# Altium PCB stm8core.PcbDoc
Units mil, origin at the board's own origin, x right, y up, seen from the top; angles counter-clockwise.
Board outline 3937.01 x 3937.01 mil, 2 copper layers (Component Side, Solder Side); 46 components, 88 nets, 299 pads, 55 vias.
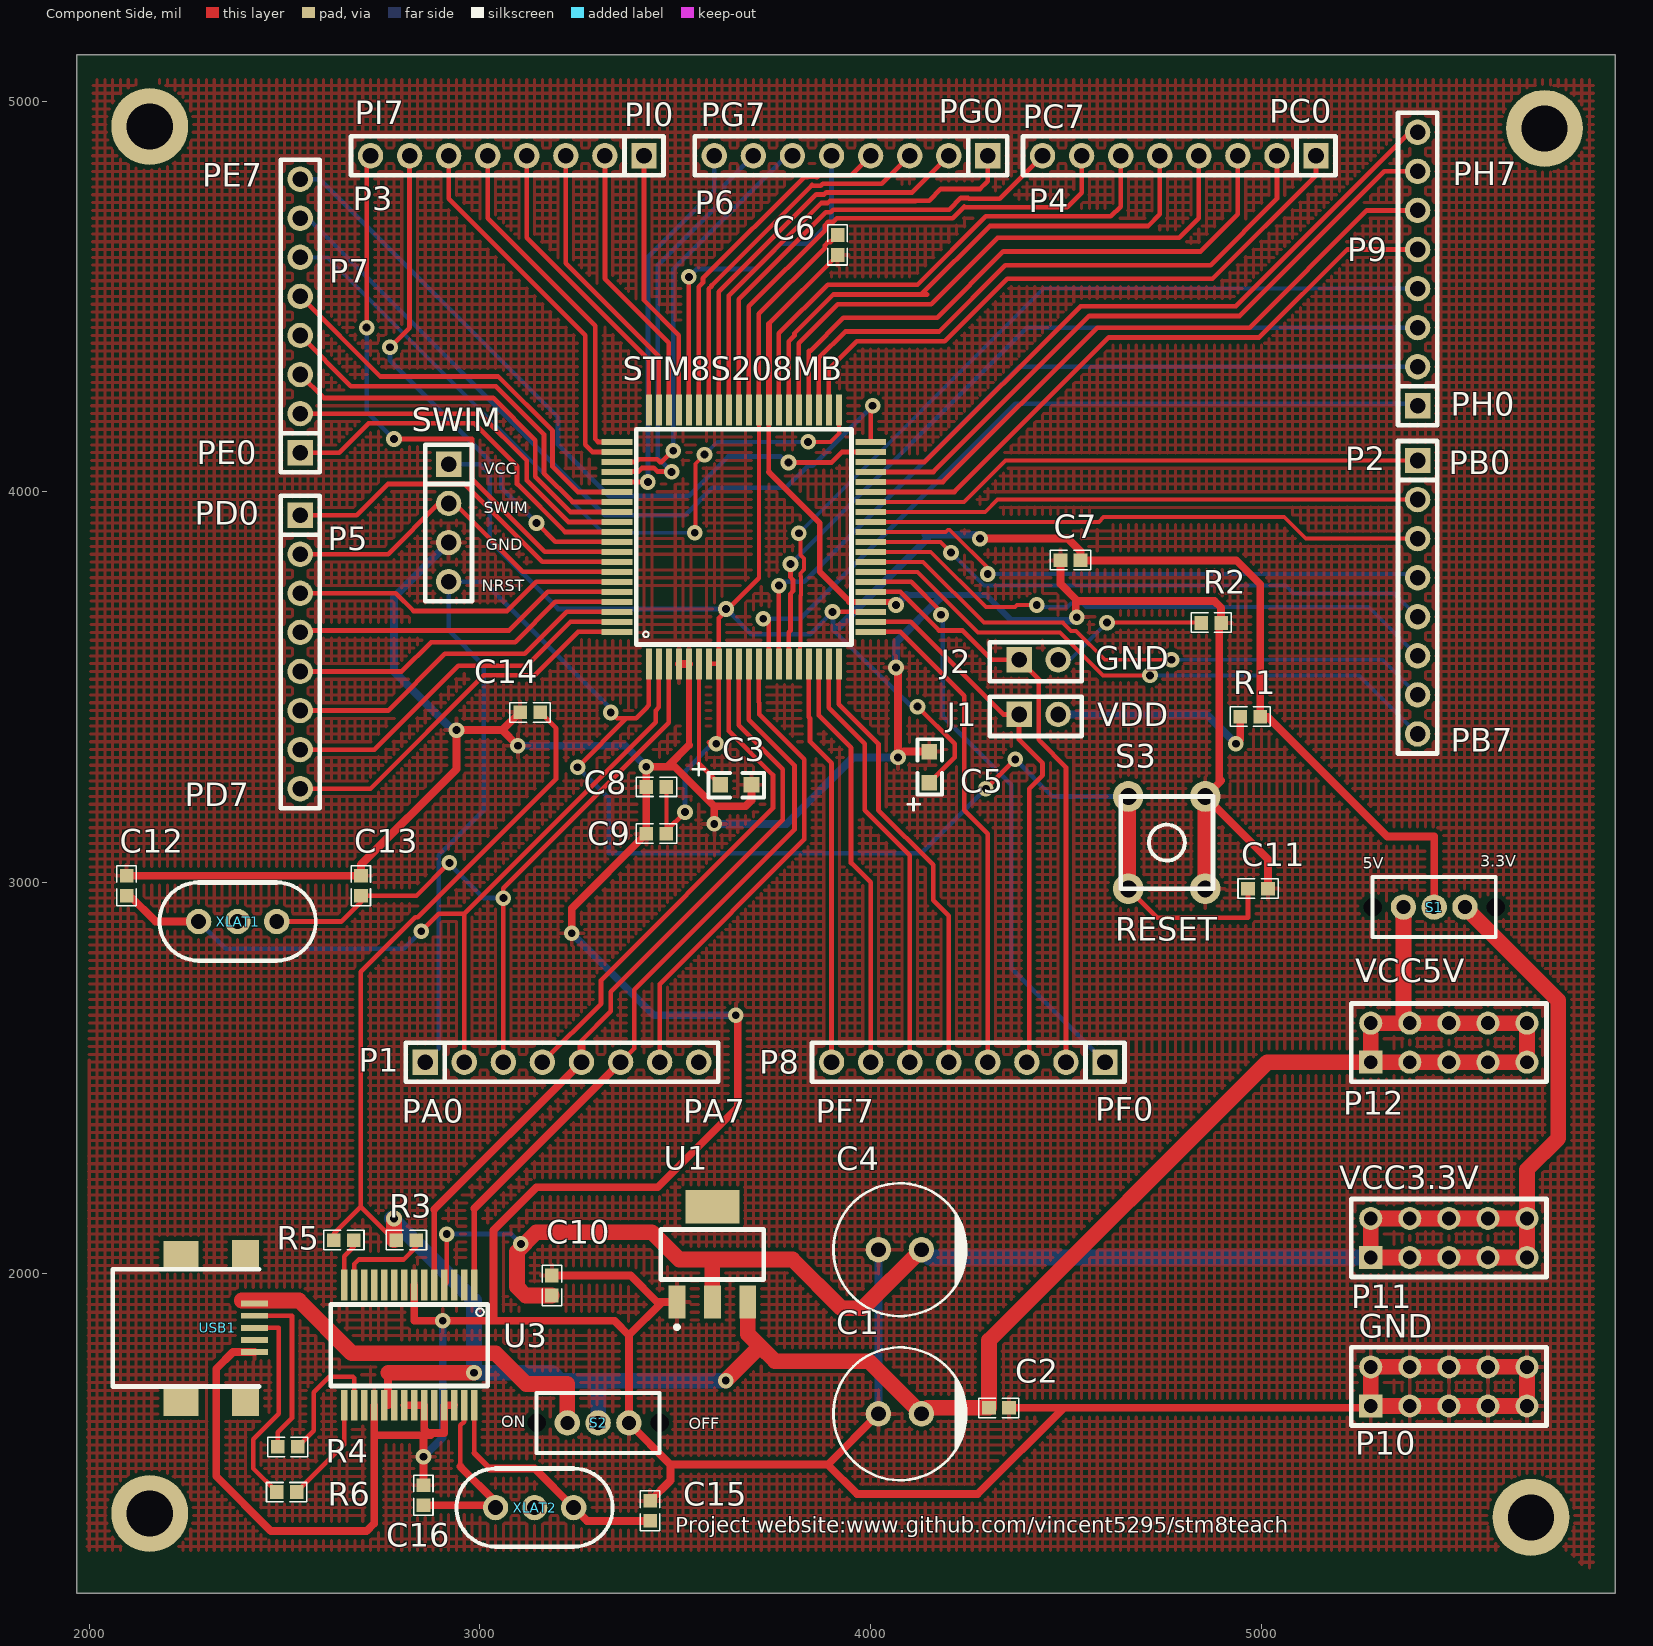
[diagram p0: Component Side view]
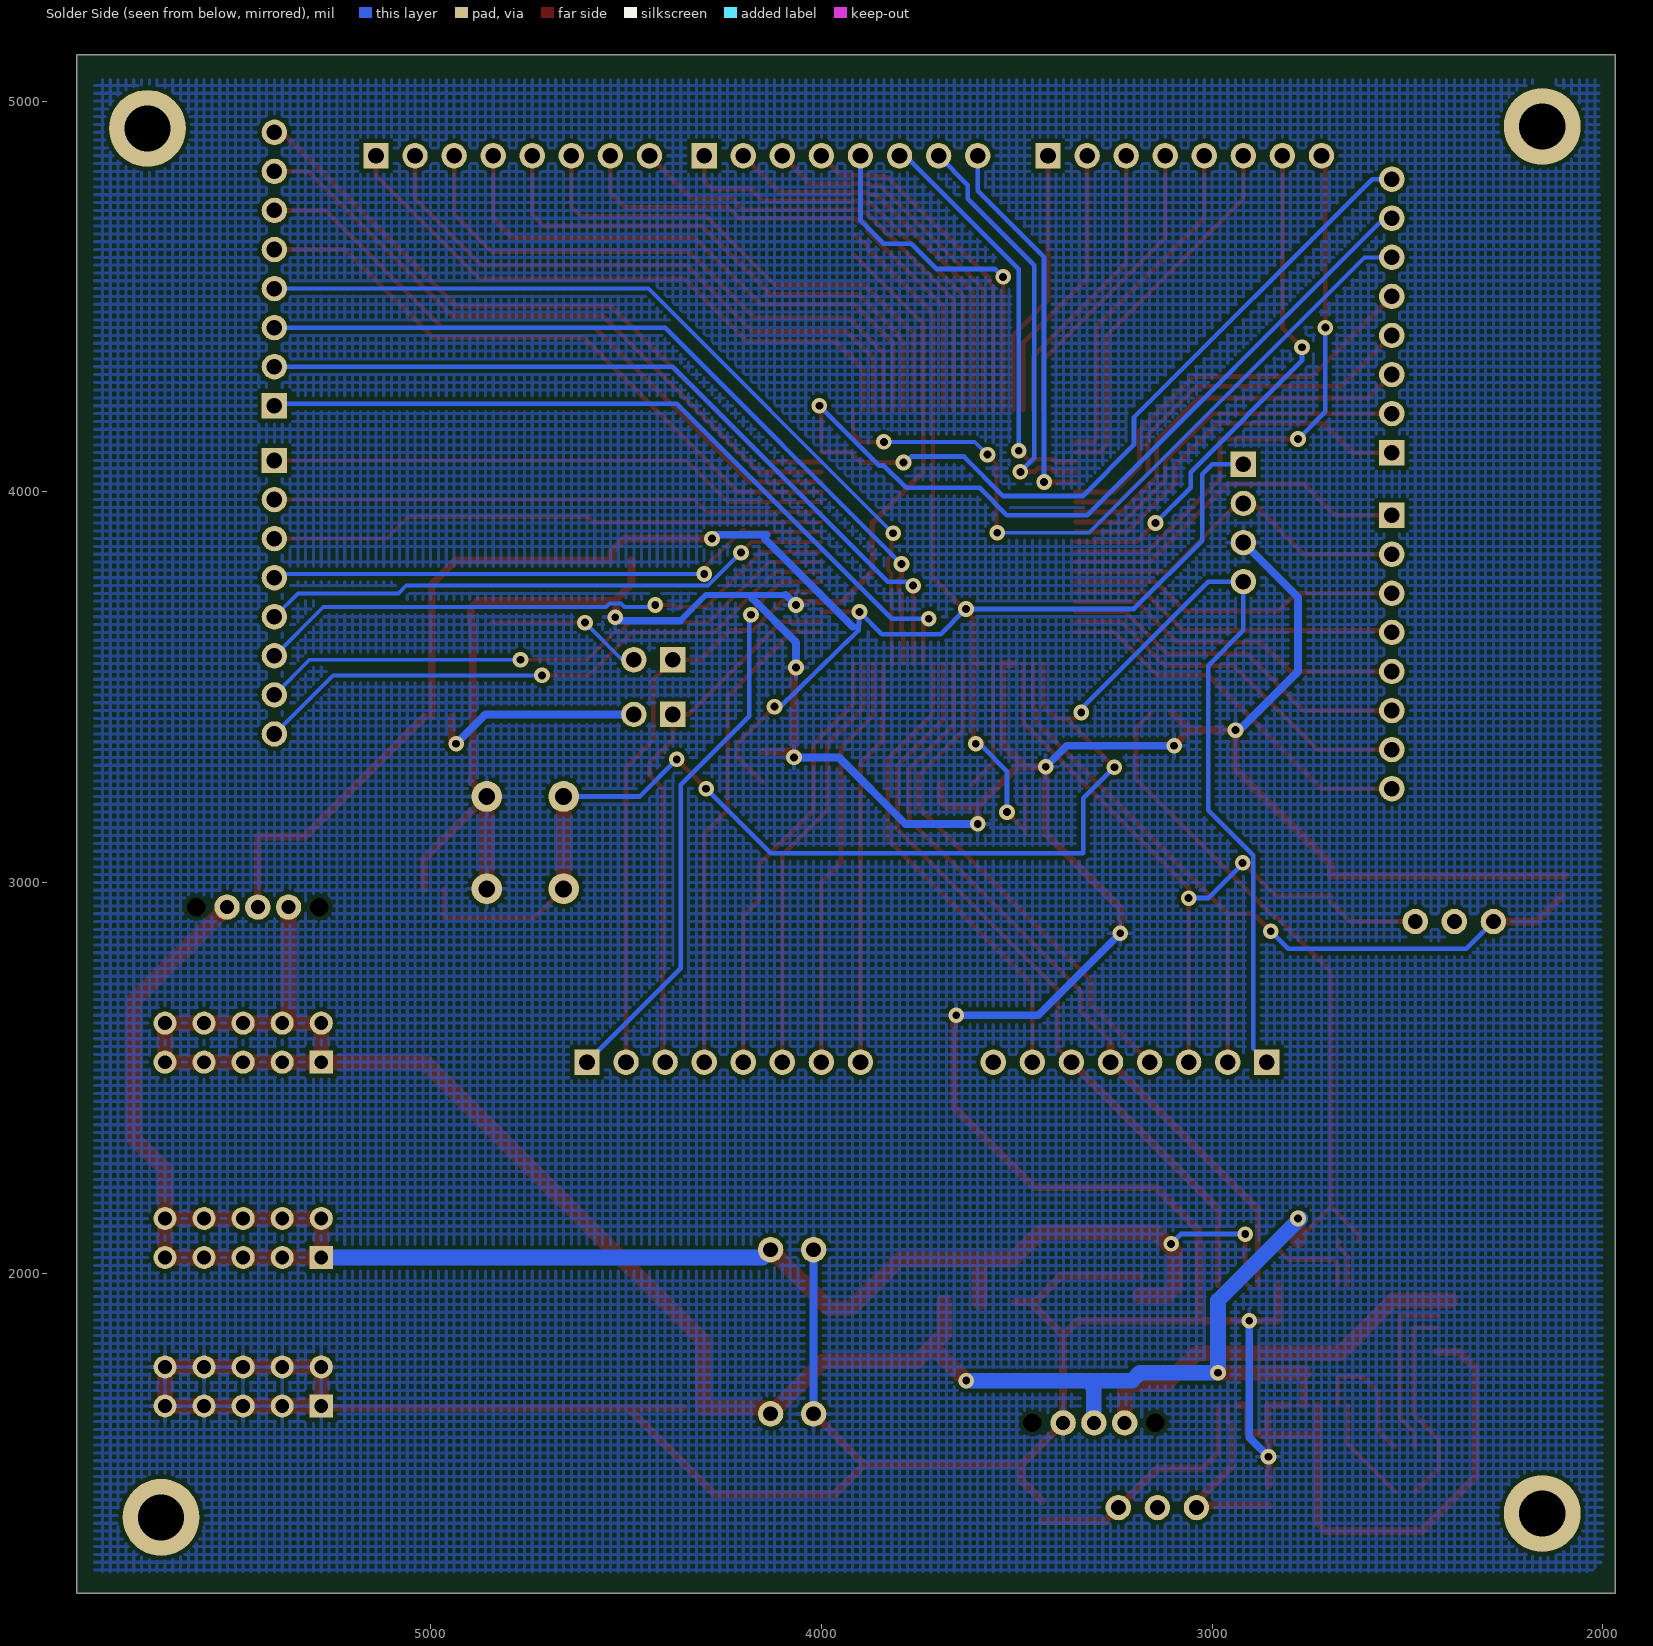
[diagram p1: Solder Side view, seen from below]

## Layer stack, top to bottom
Component Side: signal copper 1.4
Dielectric: core 12.6, FR-4, Dk 4.8
Solder Side: signal copper 1.4

## Board outline
1968.5,1181.1 5905.51,1181.1 5905.51,5118.11 1968.5,5118.11

## Design rules (kind name [scope] priority, off if disabled: settings)
Clearance [All] p1: gap=10
DiffPairsRouting [All] p1: maxlimit=10 minlimit=1 mostfreqgap=10 maxuncoupledlength=500
PolygonConnect [All] p1: connectstyle=Relief reliefconductorwidth=10 reliefentries=4 polygonreliefangle="90 Angle"
RoutingVias [All] p1: holewidth=20 width=40 viastyle="Through Hole" minholewidth=20 minwidth=40 maxholewidth=20 maxwidth=40
SilkscreenOverComponentPads [All] p1: minsilkscreentomaskgap=10
SolderMaskExpansion [All] p1: expansion=4
Width [All] p1: maxlimit=60 minlimit=10 preferedwidth=45
26 further rules are at their usual default settings.

## Components (designator, comment, footprint, x,y, rotation, side; value= is the part's Value field where it differs from the comment)
C1 "Cap2" RB-.1/.3 4020,1640 r0 top
C2 "Cap" 0603 4360,1640 r180 top
C3 "Cap Pol2" 3216 3640,3280 r0 top
C4 "Cap2" RB-.1/.3 4020,2060 r0 top
C5 "Cap Pol2" 3216 4120,3280 r90 top
C6 "Cap" 0603 3900,4600 r90 top
C7 "Cap" 0603 4480,3840 r0 top
C8 "Cap" 0603 3420,3260 r0 top
C9 "Cap" 0603 3420,3140 r0 top
C10 "Cap" 0603 3200,2000 r270 top
C11 "Cap" 0603 4960,3000 r0 top
C12 "Cap" 0603 2080,2960 r90 top
C13 "Cap" 0603 2680,2960 r90 top
C14 "Cap" 0603 3160,3420 r180 top
C15 "Cap" 0603 3420,1360 r90 top
C16 "Cap" 0603 2840,1400 r90 top
J1 "VDD" JUMPER 4300,3480 r0 top (schematic designator JUMPER1)
J2 "GND" JUMPER 4300,3620 r0 top
P1 "Header 8" SIP8 2860,2540 r0 top
P2 "Header 8" SIP8 5400,4080 r270 top
P3 "Header 8" SIP8 3420,4860 r180 top
P4 "Header 8" SIP8 5140,4860 r180 top
P5 "Header 8" SIP8 2540,3940 r270 top
P6 "Header 8" SIP8 4300,4860 r180 top
P7 "Header 8" SIP8 2540,4100 r90 top
P8 "Header 8" SIP8 4600,2540 r180 top
P9 "Header 8" SIP8 5400,4220 r90 top
P10 "GND" HDR2X5 5280,1660 r0 top
P11 "VCC3.3V" HDR2X5 5280,2040 r0 top
P12 "VCC5V" HDR2X5 5280,2540 r0 top
R1 "Res2" 0603 4940,3440 r0 top
R2 "Res2" 0603 4840,3680 r0 top
R3 "Res2" 0603 2780,2100 r0 top
R4 "Res2" 0603 2540,1540 r180 top
R5 "Res2" 0603 2620,2100 r0 top
R6 "Res2" 0603 2537.09,1424.25 r180 top
S1 "SW-SPDT" SW3 5600,2860 r180 top
S2 "SW-SPDT" SW3 3460,1540 r180 top
S3 "RESET" SW-PB 4640,3220 r0 top
STM8S208MB "STM8S208MB" LQFP80 3400,4160 r0 top (schematic designator U2)
SWIM "SWIM" SIP4 2860,4120 r0 top (schematic designator SWIM1)
U1 "AMS1117-3.3" SOT-223 3520,2220 r0 top
U3 "PL2303" SSOP28 3020,1920 r270 top
USB1 "USB" MINI_USB 2300,1860 r90 top
XLAT1 "XLAT" XTAL 2380,2900 r0 top
XLAT2 "XLAT" XTAL 3140,1400 r180 top

## Footprints (in the part's own frame and the unit in brackets; to place one, negate y for a bottom-side part, rotate by r counter-clockwise, add the part's x,y. Pads: shape width x height; smd on the part's side, far side on the other; paste and mask are expansions set on the pad)
0603 [mil]
  rect 35x35 smd: 1(5.91,-15.75) 2(57.09,-15.75)
  silkscreen extent -20,-40 83,10
3216 [mil]
  rect 40x40 smd: 1(-25,-30) 2(55,-30)
  silkscreen extent -95,-63 87,25
HDR2X5 [mm] "Connector; Header; 5x2 Position"
  rect 1.5x1.5 hole 0.9: 1(0,0)
  round 1.5 hole 0.9: 2(0,2.54) 3(2.54,0) 4(2.54,2.54) 5(5.08,0) 6(5.08,2.54) 7(7.62,0) 8(7.62,2.54) 9(10.16,0) 10(10.16,2.54)
  silkscreen extent -1.27,-1.27 11.43,3.81
JUMPER [mil]
  rect 65x65 hole 40: 1(80,-50)
  round 65 hole 40: 2(180,-50)
  silkscreen extent 5,-105 240,-5
LQFP80 [mm]
  rect 0.4x2 smd: 1(0.825,-15.254) 2(1.475,-15.254) 3(2.125,-15.254) 4(2.775,-15.254) 5(3.425,-15.254) 6(4.075,-15.254) 7(4.725,-15.254) 8(5.375,-15.254) 9(6.025,-15.254) 10(6.675,-15.254) 11(7.325,-15.254) 12(7.975,-15.254) 13(8.625,-15.254) 14(9.275,-15.254) 15(9.925,-15.254) 16(10.575,-15.254) 17(11.225,-15.254) 18(11.875,-15.254) 19(12.525,-15.254) 20(13.175,-15.254) 41(13.175,1.254) 42(12.525,1.254) 43(11.875,1.254) 44(11.225,1.254) 45(10.575,1.254) 46(9.925,1.254) 47(9.275,1.254) 48(8.625,1.254) 49(7.975,1.254) 50(7.325,1.254) 51(6.675,1.254) 52(6.025,1.254) 53(5.375,1.254) 54(4.725,1.254) 55(4.075,1.254) 56(3.425,1.254) 57(2.775,1.254) 58(2.125,1.254) 59(1.475,1.254) 60(0.825,1.254)
  rect 2x0.4 smd: 21(15.254,-13.175) 22(15.254,-12.525) 23(15.254,-11.875) 24(15.254,-11.225) 25(15.254,-10.575) 26(15.254,-9.925) 27(15.254,-9.275) 28(15.254,-8.625) 29(15.254,-7.975) 30(15.254,-7.325) 31(15.254,-6.675) 32(15.254,-6.025) 33(15.254,-5.375) 34(15.254,-4.725) 35(15.254,-4.075) 36(15.254,-3.425) 37(15.254,-2.775) 38(15.254,-2.125) 39(15.254,-1.475) 40(15.254,-0.825) 61(-1.254,-0.825) 62(-1.254,-1.475) 63(-1.254,-2.125) 64(-1.254,-2.775) 65(-1.254,-3.425) 66(-1.254,-4.075) 67(-1.254,-4.725) 68(-1.254,-5.375) 69(-1.254,-6.025) 70(-1.254,-6.675) 71(-1.254,-7.325) 72(-1.254,-7.975) 73(-1.254,-8.625) 74(-1.254,-9.275) 75(-1.254,-9.925) 76(-1.254,-10.575) 77(-1.254,-11.225) 78(-1.254,-11.875) 79(-1.254,-12.525) 80(-1.254,-13.175)
  silkscreen extent 0,-14 14,0
MINI_USB [mil]
  rect 15x70 smd: 1(62,-123) 2(31,-123) 3(0,-123) 4(-62,-123) NC(-31,-123)
  rect 70x70 smd: ""(-190,-100) ""(190,-100)
  rect 70x90 smd: ""(-190,65) ""(187,65)
  silkscreen extent -150,-135 150,240
RB-.1/.3 [mil] "47uF 100uF 220uF 470uF"
  round 65 hole 38: 1(0,0) 2(110,0)
  silkscreen extent -115,-170 226,170
SIP4 [mil]
  rect 65x65 hole 40: 1(60,-50)
  round 65 hole 40: 2(60,-150) 3(60,-250) 4(60,-350)
  silkscreen extent 0,-400 120,0
SIP8 [mil]
  rect 65x65 hole 40: 1(0,0)
  round 65 hole 40: 2(100,0) 3(200,0) 4(300,0) 5(400,0) 6(500,0) 7(600,0) 8(700,0)
  silkscreen extent -50,-50 750,50
SOT-223 [mm]
  rect 1.1x2.15 smd: 1(-0.395,-7.47) 2(1.905,-7.47) 3(4.205,-7.47)
  rect 3.5x2.15 smd: 4(1.905,-1.27)
  silkscreen extent -1.45,-9.22 5.26,-2.74
SSOP28 [mm] "SSOP28forPL2303"
  rect 2x0.42 smd: 1(-1.254,-0.875) 2(-1.254,-1.525) 3(-1.254,-2.175) 4(-1.254,-2.825) 5(-1.254,-3.475) 6(-1.254,-4.125) 7(-1.254,-4.775) 8(-1.254,-5.425) 9(-1.254,-6.075) 10(-1.254,-6.725) 11(-1.254,-7.375) 12(-1.254,-8.025) 13(-1.254,-8.675) 14(-1.254,-9.325) 15(6.554,-9.325) 16(6.554,-8.675) 17(6.554,-8.025) 18(6.554,-7.375) 19(6.554,-6.725) 20(6.554,-6.075) 21(6.554,-5.425) 22(6.554,-4.775) 23(6.554,-4.125) 24(6.554,-3.475) 25(6.554,-2.825) 26(6.554,-2.175) 27(6.554,-1.525) 28(6.554,-0.875)
  silkscreen extent 0,-10.2 5.3,0
SW3 [mm]
  round 1.651 hole 0.914: 1(2,-1.95) 2(4,-1.95) 3(6,-1.95)
  round 0 hole 1.2: ""(0,-1.95) ""(8,-1.95)
  silkscreen extent 0,-3.9 8,0
SW-PB [mm]
  round 2 hole 1.1: 1(0.5,-6) 1(0.5,0) 2(5.5,-6) 2(5.5,0)
  silkscreen extent 0,-6 6,0
XTAL [mil]
  round 65 hole 38: 1(-100,0) 2(100,0) ""(0,0)
  silkscreen extent -200,-100 200,100

## Part data
C1 C2 C4 C6 C7 C8 C9 C10 C11 C12 C13 C14 C15 C16: "Capacitor"
C3 C5: "Polarized Capacitor (Axial)"
J1 J2: library part JNMPER
P1 P2 P3 P4 P5 P6 P7 P8 P9: "Header, 8-Pin"
P10 P11 P12: library part "Header 5X2", "Header, 5-Pin, Dual row"
R1 R2 R3 R4 R5 R6: "Resistor"
S1 S2: "SPDT Subminiature Toggle Switch, Right Angle Mounting, Vertical Actuation"
S3: library part SW-PB, "Switch"
STM8S208MB: library part STM8
XLAT1 XLAT2: library part MYXLAT

## Free pads (board coordinates)
  round 196.85 hole 118.11: ""(2155,1385) ""(2155,4935) ""(5690,1375) ""(5725,4930)

## Via types
v1: diameter 40, hole 20, Component Side to Solder Side, 55 vias

## Nets (pads, with @x,y where several pads share a name; then routed paths per layer and width w, separated by ;. In a path a pad name is that pad's centre, name@x,y a point inside that pad or via, vN(x,y) a via of type N, cw(c..) or ccw(c..) an arc to the next point about the centre after c; other vN are vias at no path point)
GND: C1.1 C2.1 C3.2 C4.1 C5.2 C6.1 C7.1 C8.1 C9.1 C10.1 C11.2 C12.2 C13.2 C14.2 C15.2 C16.2 P10.1 P10.2 P10.3 P10.4 P10.5 P10.6 P10.7 P10.8 P10.9 P10.10 R2.2 S2.1 S3.2 STM8S208MB.4 STM8S208MB.5 STM8S208MB.24 STM8S208MB.48 SWIM.3 U1.1 U3.7 U3.18 U3.21 U3.22 U3.23 U3.25 U3.26 USB1.4 | length 16880.9
  Component Side w12: 3739.57,4050.43 STM8S208MB.48 ; 3739.57,4429.72 C6.1
  Component Side w15: 3534.84,3351.06 STM8S208MB.5 ; 3739.57,4050.43 3870,3920 3870,3795 3940,3725 ; STM8S208MB.48 3739.57,4429.72 ; 3945,3718.07 STM8S208MB.24 v1@4056.93,3718.07
  Component Side w20: C12.2 C13.2 2695.75,3045.75 2940,3290 v1(2940,3390) 3057.17,3390 ; USB1.4 2368,1798 2325,1755 2325,1480 2465,1340 2710,1340 2729.65,1359.65 2729.65,1585 ; U3.18 2729.65,1585 ; U3.21 U3.22 U3.23 2857.6,1599.84 2866.22,1591.22 2908.78,1591.22 U3.25 U3.26 ; U3.7 2832.01,1877.99 v1(2905,1877.99) 3035,1877.99 ; C16.2 v1(2855.75,1530) 2855.75,1584.25 ; 2873.78,1585 2729.65,1585 ; v1(3097.17,3350) 3057.17,3390 ; C14.2 3057.17,3390 ; C10.1 3385.91,1994.09 3454.09,1925.91 3465.91,1925.91 ; v1(3235,2870) 3235,2933.35 C9.1 C8.1 v1(3425.91,3296.22) 3480,3296.22 ; C15.2 3488.03,1469.37 3488.03,1510 ; U1.1 3465.91,1925.91 ; STM8S208MB.4 STM8S208MB.5 ; 3534.84,3351.06 3480,3296.22 ; v1(3600,3150) 3600,3195 ; v1(3655,2660) 3660,2660 3660,2425 3455,2220 3145,2220 3035,2110 3035,1877.99 ; C3.2 3695,3210 3680,3195 3600,3195 ; C1.1 3890,1510 ; v1@4056.93,3718.07 v1(4065,3710) ; v1(4065,3550) 4070,3545 v1(4070,3320) 4085,3335 C5.2 ; C2.1 4495,1655.75 ; C7.1 4485.91,3764.09 4525,3725 ; v1(4527.77,3679) 4525,3681.77 4525,3725 ; 4892.09,3255.55 R2.2@4892.09,3659.25 ; 4897.09,3260.55 4856.54,3220 5017.09,3059.45 C11.2 ; R2.2 4897.09,3702.91 4880,3720 4530,3720 4525,3725 ; P10.1@5275.75,1655.75 4495,1655.75 ; 3035,1877.99 3344.53,1877.99 3381.26,1841.26 ; 3381.26,1841.26 S2.1 3488.03,1510 ; 3381.26,1841.26 3465.91,1925.91 ; 3480,3296.22 3498.78,3296.22 3600,3195 ; 3488.03,1510 3890,1510 ; 3890,1510 3965,1435 4274.25,1435 4495,1655.75
  Component Side w40: S3.2@4856.54,2983.78 S3.2@4856.54,3220 ; P10.2@5280,1745 P10.1 P10.3 P10.5 P10.7 P10.9 P10.10 P10.8 P10.6 P10.4 P10.2
  Solder Side w15: 4091,3736 4295.16,3736 4361.16,3670
  Solder Side w20: v1(2855.75,1530) 2905,1579.25 v1(2905,1877.99) ; SWIM.3 2780,3730 2780,3540 2935,3385 v1(2940,3390) ; v1(3097.17,3350) 3372.13,3350 v1(3425.91,3296.22) ; v1(3235,2870) 3445,2660 v1(3655,2660) ; v1(3600,3150) 3785,3150 3955,3320 v1(4070,3320) ; C1.1 C4.1 ; v1(4065,3550) 4065,3615 4176,3726 ; v1(4065,3710) 4091,3736 ; 4361.16,3670 4518.77,3670 v1(4527.77,3679)
NetJ1_2: J1.2 R1.1 | length 559.8
  Component Side w20: v1(4935,3355) 4945.91,3365.91 R1.1
  Solder Side w20: J1.2 4860,3430 v1(4935,3355)
NetJ2_2: J2.2 R2.1 | length 404.5
  Component Side w10: v1(4605,3665) R2.1@4845.16,3665
  Solder Side w10: J2.2 4510,3570 v1(4605,3665)
NetR3_2: R3.2 U3.13 | length 248
  Component Side w12: U3.13 2678.46,2023.46 2690,2035 2805,2035 2837.09,2067.09 R3.2
NetR4_1: R4.1 U3.16 | length 347.2
  Component Side w12: R4.1 2575,1596.65 2575,1695 2615,1735 2675,1735 2678.46,1731.54 U3.16
NetR5_2: R5.2 U3.14 | length 124.9
  Component Side w12: U3.14 2652.87,2042.87 2677.09,2067.09 R5.2
NetR6_1: R6.1 U3.15 | length 272.4
  Component Side w12: R6.1 2652.87,1561.69 U3.15
NRST: C11.1 P1.1 S3.1 STM8S208MB.1 SWIM.4 | length 4583
  Component Side w12: v1(3250,3295) 3375,3420 ; 3350,3420 3375,3420 ; STM8S208MB.1 3432.48,3453.59 3428,3449.11 3428,3448.04 3399.96,3420 3375,3420 ; v1(4295,3240) v1(4370,3315) ; S3.1@4659.69,2983.78 4733.47,2910 4960.91,2910 ; 4965.91,2910 C11.1
  Component Side w40: S3.1@4659.69,2983.78 S3.1@4659.69,3220
  Solder Side w12: 2895,2575 2895,3070 3010,3185 3010,3555 2920,3645 SWIM.4 3010,3770 3335,3445 v1(3335,3435) ; v1(3250,3295) 3330,3215 3330,3075 4130,3075 v1(4295,3240) ; v1(4370,3315) 4465,3220 S3.1@4659.69,3220
OSCIN: C12.1 P1.2 STM8S208MB.2 XLAT1.1 | length 2175.2
  Component Side w12: v1(2850,2875) 2895,2920 2960,2920 ; P1.2 2960,2920 ; STM8S208MB.2 3458.07,3448.07 3450,3440 3450,3410 2960,2920
  Component Side w20: C12.1@2104.09,2965.91 2170,2900 XLAT1.1
  Solder Side w12: XLAT1.1 2350,2830 2805,2830 v1(2850,2875)
OSCOUT: C13.1 P1.3 STM8S208MB.3 XLAT1.2 | length 1869.5
  Component Side w12: XLAT1.2 2645,2900 C13.1@2695.75,2950.75 ; C13.1 2837.72,2965.91 v1(2922,3050.18) ; P1.3 v1(3060,2960) 3060,2985 3483.66,3408.66 STM8S208MB.3
  Solder Side w12: v1(2922,3050.18) 2922,3048 3010,2960 v1(3060,2960)
PA3: P1.4 STM8S208MB.9 | length 1310.6
  Component Side w12: P1.4 3310,2690 3310,2750 3750,3190 3750,3275 3637.2,3387.8 STM8S208MB.9
PA4: P1.5 STM8S208MB.10 U3.5 | length 1996
  Component Side w12: 3260,2595 3335,2670 3335,2720 3775,3160 3775,3290 3662.8,3402.2 STM8S208MB.10
  Component Side w15: U3.5 2883.19,2163.19
  Component Side w20: 2883.19,2163.19 P1.5 3260,2585
PA5: P1.6 STM8S208MB.11 U3.1 | length 1977.8
  Component Side w12: P1.6 3395,2575 3395,2725 3805,3135 3805,3300 3688.39,3416.61 STM8S208MB.11
  Component Side w15: U3.1 2985.55,2165.55
  Component Side w20: 2985.55,2165.55 P1.6
PA6: P1.7 STM8S208MB.12 | length 1220.8
  Component Side w12: P1.7 3460,2740 3830,3110 3830,3315 3715,3430 3715,3460 3713.98,3461.02 STM8S208MB.12
PA7: P1.8
PB0: P2.1 STM8S208MB.34 | length 1443.4
  Component Side w10: STM8S208MB.34 4238.98,3973.98 4345,4080 P2.1
PB1: P2.2 STM8S208MB.33 | length 1412.5
  Component Side w10: STM8S208MB.33 4293.39,3948.39 4325,3980 P2.2
PB2: P2.3 STM8S208MB.32 | length 1427.3
  Component Side w10: STM8S208MB.32 4584.05,3922.8 4596.25,3935 5058.75,3935 5113.75,3880 P2.3
PB3: P2.4 STM8S208MB.31 | length 1439.5
  Component Side w10: STM8S208MB.31 4192.2,3897.2 4197.8,3902.8 ; 4202.2,3902.8 v1@4307.8,3797.2
  Solder Side w10: v1(4300,3789.41) P2.4@5390.59,3789.41
PB4: P2.5 STM8S208MB.30 | length 1478.8
  Component Side w10: STM8S208MB.30 4178.39,3871.61 v1(4205.69,3844.31)
  Solder Side w10: v1(4205.69,3844.31) 4290,3760 5062.5,3760 5082.5,3740 5340,3740 P2.5
PB5: P2.6 STM8S208MB.29 | length 1514.2
  Component Side w10: STM8S208MB.29 4153.98,3846.02 4295,3705 4370,3705 4375,3710 v1(4425,3710)
  Solder Side w10: v1@4430,3705 4504.27,3705 4513.27,3714 4542.27,3714 4551.27,3705 5275,3705 P2.6
PB6: P2.7 STM8S208MB.28 | length 1540.8
  Component Side w10: STM8S208MB.28 4134.57,3820.43 4290,3665 4492.77,3665 4492.77,3664.5 4513.27,3644 4526,3644 4600,3570 v1(4770,3570)
  Solder Side w10: v1(4770,3570) 5310,3570 P2.7
PB7: P2.8 STM8S208MB.27 | length 1571.3
  Component Side w10: STM8S208MB.27 4120.16,3794.84 4275,3640 4485,3640 4595,3530 v1(4715,3530)
  Solder Side w10: v1(4715,3530) 5250,3530 P2.8
PC0: P4.1 STM8S208MB.42 | length 1606.4
  Component Side w12: STM8S208MB.42 3893.11,4313.11 3965,4385 4190,4385 4350,4545 4875,4545 5140,4810 P4.1
PC1: P4.2 STM8S208MB.43 | length 1584.4
  Component Side w12: STM8S208MB.43 3867.52,4342.52 3935,4410 4175,4410 4345,4580 4870,4580 5040,4750 P4.2
PC2: P4.3 STM8S208MB.44 | length 1543.7
  Component Side w12: STM8S208MB.44 3841.93,4360 3845,4360 3930,4445 4170,4445 4340,4615 4845,4615 4940,4710 P4.3
PC3: P4.4 STM8S208MB.45 | length 1486.8
  Component Side w12: STM8S208MB.45 3816.34,4380 3916.34,4480 4155,4480 4325,4650 4790,4650 4840,4700 P4.4
PC4: P4.5 STM8S208MB.46 | length 1422
  Component Side w12: STM8S208MB.46 3790.75,4385 ; 3794.34,4388.59 3794.34,4389.11 3805,4399.77 3805,4405 3905,4505 4130,4505 ; 4144.25,4505 4130,4505 ; P4.5 4740,4710 4710,4680 4305,4680 4130,4505
PC5: P4.6 STM8S208MB.47 | length 1335.2
  Component Side w12: STM8S208MB.47 3765.16,4405.16 3890,4530 4120,4530 4295,4705 4615,4705 4640,4730 P4.6
PC6: P4.7 STM8S208MB.50 | length 1341.3
  Component Side w12: STM8S208MB.50 3688.39,4474.62 3882.25,4668.49 3882.25,4681.21 3891.62,4690.59 3904.35,4690.59 3913.76,4700 4210,4700 4240,4730 4242,4728 4503,4728 4540,4765 P4.7
PC7: P4.8 STM8S208MB.51 | length 1214.4
  Component Side w12: STM8S208MB.51 3662.8,4492.87 3884.92,4715 3897.65,4715 3904.65,4722 4200.89,4722 4230.89,4752 4249.11,4752 4251.11,4750 4330,4750 P4.8
PD0: P5.1 STM8S208MB.73 | length 926.4
  Component Side w12: P5.1 2685,3940 2765,4020 2960,4020 3159.57,3820.43 STM8S208MB.73
PD1: P5.2 STM8S208MB.74 SWIM.2 | length 937
  Component Side w12: P5.2 2765,3840 2895,3970 SWIM.2 2935,3970 3110.16,3794.84 STM8S208MB.74
PD2: P5.3 STM8S208MB.75 | length 860
  Component Side w12: P5.3 2785,3740 2830,3695 3070,3695 3144.25,3769.25 STM8S208MB.75
PD3: P5.4 STM8S208MB.76 | length 846.5
  Component Side w12: P5.4@2545,3645 3075,3645 3173.66,3743.66 STM8S208MB.76
PD4: P5.5 STM8S208MB.77 | length 884.4
  Component Side w12: P5.5 2800,3540 2875,3615 3090,3615 3193.07,3718.07 STM8S208MB.77
PD5: P5.6 STM8S208MB.78 | length 915.2
  Component Side w12: P5.6 2765,3440 2910,3585 3115,3585 3222.48,3692.48 STM8S208MB.78
PD6: P5.7 STM8S208MB.79 | length 946
  Component Side w12: P5.7 2730,3340 2945,3555 3120,3555 3231.89,3666.89 STM8S208MB.79
PD7: P5.8 STM8S208MB.80 | length 976.9
  Component Side w12: P5.8 2720,3240 3010,3530 3140,3530 3251.3,3641.3 STM8S208MB.80
PE0: P7.1 STM8S208MB.70 | length 983.1
  Component Side w12: P7.1 2640,4100 2715,4175 2985,4175 3095,4065 3095,4020 3217.8,3897.2 STM8S208MB.70
PE1: P7.2 STM8S208MB.69 | length 955.4
  Component Side w12: P7.2 3000,4200 3120,4080 3120,4028.89 3226.09,3922.8 STM8S208MB.69
PE2: P7.3 STM8S208MB.68 | length 1011.3
  Component Side w12: P7.3 2600,4240 3033.89,4240 3142,4131.89 3142,4038 3231.61,3948.39 STM8S208MB.68
PE3: P7.4 STM8S208MB.67 | length 1045.7
  Component Side w12: P7.4 2670,4270 3041.11,4270 3164,4147.11 3164,4047.11 3237.14,3973.98 STM8S208MB.67
PE4: P7.5 STM8S208MB.66 | length 1071.9
  Component Side w12: P7.5 2745,4295 3047.23,4295 3186,4156.23 3186,4064 3250.43,3999.57 STM8S208MB.66
PE5: P7.6 STM8S208MB.41 | length 1938.5
  Component Side w10: v1@3551.64,3896.64 3551.64,4071.64 v1(3575,4095) ; v1(3840,4127.5) 3897.5,4127.5 3918.7,4148.7 ; STM8S208MB.41 3918.7,4148.7 ; 3920,4150 3918.7,4148.7
  Solder Side w10: P7.6 2610,4600 3315,3895 v1(3550,3895) ; v1(3575,4095) 3607.5,4127.5 v1(3840,4127.5)
PE6: P7.7 STM8S208MB.40 | length 1970.1
  Component Side w12: STM8S208MB.40 4000.55,4215.55 v1(4005,4220)
  Solder Side w12: P7.7@2560,4700 3320,3940 3465,3940 3525,3940 3595,4010 3783.03,4010 3840.03,4067 3852,4067 v1(4005,4220)
PE7: P7.8 STM8S208MB.39 | length 1901.7
  Component Side w12: v1(3790,4075) 3900,4075 3926.93,4101.93 STM8S208MB.39
  Solder Side w12: P7.8 2590,4800 3200,4190 3200,4120 3331,3989 3534,3989 3635,4090 3770,4090 3785,4075 v1(3790,4075) v1@3790,4080
PF0: P8.1 STM8S208MB.26 | length 1538.3
  Component Side w12: STM8S208MB.26 4104.25,3769.25 4180,3693.5 v1(4180,3685)
  Solder Side w12: v1(4180,3685) 4185,3680 4185,3425 4360,3250 4360,2780 P8.1
PF1: J2.1 P8.2 STM8S208MB.25 | length 1531.1
  Component Side w12: STM8S208MB.25 4076.34,3743.66 4175,3645 4235,3645 4310,3570 J2.1 4435,3515 ; 4430,3365 4430,3520 ; 4435,3360 4500,3295 P8.2
PF2: J1.1 P8.3 STM8S208MB.22 | length 1437.3
  Component Side w12: STM8S208MB.22 4103.11,3666.89 4340,3430 J1.1 ; P8.3 4406,2546 4406,3240 4440,3274 4440,3305 4380,3365 J1.1 ; J1.1@4400,3410 J1.1
PF3: P8.4 STM8S208MB.21 | length 1282.2
  Component Side w12: STM8S208MB.21 4076.3,3641.3 4223.8,3493.8 ; 4232.6,3485 4223.8,3493.8 ; P8.4 4300,3125 4240,3185 4240,3477.6 4223.8,3493.8
PF4: P8.5 STM8S208MB.20 | length 1136
  Component Side w12: STM8S208MB.20 3918.7,3456.3 4020,3355 4020,3185 4160,3045 4160,2955 4200,2915 P8.5
PF5: P8.6 STM8S208MB.19 | length 1105.1
  Component Side w12: STM8S208MB.19 3893.11,3446.89 3985,3355 3985,3185 4100,3070 P8.6
PF6: P8.7 STM8S208MB.18 | length 1089.3
  Component Side w12: STM8S208MB.18 3867.52,3427.48 3950,3345 3950,3050 4000,3000 4000,2815 ; P8.7 4000,2815 ; 4000,2800 4000,2815
PF7: P8.8 STM8S208MB.17 | length 1043.5
  Component Side w12: STM8S208MB.17 3841.93,3423.07 3845,3420 3845,3360 3900,3305 P8.8
PG0: P6.1 STM8S208MB.52 | length 1141.9
  Component Side w12: STM8S208MB.52 3637.2,4502.2 3874,4739 3890.54,4739 3895.54,4744 4115.11,4744 4116.11,4745 4150,4745 4180,4775 4280,4775 4300,4795 P6.1
PG1: P6.2 STM8S208MB.53 | length 1034.9
  Component Side w12: STM8S208MB.53 3611.61,4511.61 3861,4761 3881.42,4761 3886.42,4766 4106,4766 P6.2
PG2: P6.3 STM8S208MB.54 | length 967.7
  Component Side w12: STM8S208MB.54 3586.02,4519 3592.84,4525.82 3592.84,4527.84 3850,4785 3852,4783 3872.31,4783 3877.31,4788 4028,4788 P6.3
PG3: P6.4 STM8S208MB.55 | length 901.7
  Component Side w12: STM8S208MB.55 3560.43,4524.52 3570.84,4534.93 3570.84,4545.84 3830,4805 3838.89,4805 3840.89,4807 3859.11,4807 3861.11,4805 3863.2,4805 3868.2,4810 3950,4810 P6.4
PG4: P6.5 STM8S208MB.56 | length 930.8
  Component Side w12: STM8S208MB.56 v1(3534.84,4549.84)
  Solder Side w12: v1(3534.84,4549.84) 3555,4570 3705,4570 3770,4635 3840,4635 3900,4695 P6.5
PG5: P6.6 STM8S208MB.63 | length 1051.9
  Component Side w12: STM8S208MB.63 3399.31,4076.34 3405.98,4083 3454.02,4083 3460.69,4076.34 3465.43,4076.34 3494.09,4105 v1(3495,4105)
  Solder Side w12: v1(3495,4105) 3495,4570 3785,4860 P6.6
PG6: P6.7 STM8S208MB.64 | length 1074.2
  Component Side w12: STM8S208MB.64 3351.88,4052 3406.09,4052 3415.09,4061 3444.91,4061 3453.91,4052 3489.5,4052 v1(3490.75,4050.75)
  Solder Side w12: v1(3490.75,4050.75) 3455,4086.5 3455,4580 3625,4750 3625,4785 P6.7
PG7: P6.8 STM8S208MB.65 | length 984.9
  Component Side w12: STM8S208MB.65 3429.84,4025.16 v1(3430,4025)
  Solder Side w12: v1(3430,4025) 3430,4600 3600,4770 P6.8
PH0: P9.1 STM8S208MB.13 | length 2025.3
  Component Side w12: v1(3725,3675) 3735,3675 3739.57,3670.43 STM8S208MB.13
  Solder Side w12: v1(3725,3675) 3820,3675 4370,4225 P9.1@5395,4225
PH1: P9.2 STM8S208MB.14 | length 2067.3
  Component Side w12: STM8S208MB.14 v1(3765.16,3759.84)
  Solder Side w12: v1(3765.16,3759.84) 3775.32,3770 3830,3770 4380,4320 P9.2
PH2: P9.3 STM8S208MB.15 | length 2118
  Component Side w12: STM8S208MB.15 3790.75,3640.75 3795,3645 3795,3738.77 3801.16,3744.93 3801.16,3774.75 3795,3780.91 v1(3795,3815)
  Solder Side w12: v1(3795,3815) 4400,4420 P9.3
PH3: P9.4 STM8S208MB.16 | length 2189.6
  Component Side w10: STM8S208MB.16 3819.06,3562.17 3819.06,3605.03 3821,3606.98 3821,3735.07 3822.16,3736.23 3822.16,3783.45 3821,3784.61 3821,3791.5 3830,3800.5 3830,3829.5 3821,3838.5 3821,3889 v1(3816.34,3893.66)
  Solder Side w10: v1(3816.34,3893.66) 4442.68,4520 P9.4
PH4: P9.5 STM8S208MB.35 | length 1656.4
  Component Side w12: STM8S208MB.35 4214.57,3999.57 4610,4395 4995,4395 5220,4620 P9.5
PH5: P9.6 STM8S208MB.36 | length 1687.3
  Component Side w12: STM8S208MB.36 4185.16,4025.16 4580,4420 4970,4420 5270,4720 P9.6
PH6: P9.7 STM8S208MB.37 | length 1718.1
  Component Side w12: STM8S208MB.37 4160.75,4050.75 4560,4450 4945,4450 5315,4820 P9.7
PH7: P9.8 STM8S208MB.38 | length 1732.4
  Component Side w12: STM8S208MB.38 4138.66,4076.34 4537.32,4475 4935,4475 P9.8@5382.5,4922.5
PI0: P3.1 STM8S208MB.57 | length 687.6
  Component Side w12: P3.1 3420,4490 3509.25,4400.75 STM8S208MB.57
PI1: P3.2 STM8S208MB.58 | length 718.4
  Component Side w12: P3.2 3320,4545 3483.66,4381.34 STM8S208MB.58
PI2: P3.3 STM8S208MB.59 | length 749.2
  Component Side w12: P3.3 3220,4585 3458.07,4346.93 STM8S208MB.59
PI3: P3.4 STM8S208MB.60 | length 780.1
  Component Side w12: P3.4 3120,4650 3432.48,4337.52 STM8S208MB.60
PI4: P3.5 STM8S208MB.61 | length 897.6
  Component Side w12: P3.5 3020,4700 3295,4425 3295,4135 3302.48,4127.52 STM8S208MB.61
PI5: P3.6 STM8S208MB.62 | length 973.1
  Component Side w12: P3.6 2920,4750 3270,4400 3270,4120 3288.07,4101.93 STM8S208MB.62
PI6: P3.7 STM8S208MB.71 | length 1341.7
  Component Side w12: v1(2770,4370) 2820,4420 P3.7 ; v1(3145,3920) 3193.39,3871.61 STM8S208MB.71
  Solder Side w12: v1(2770,4370) 2770,4335 3055,4050 3055,4010 v1(3145,3920)
PI7: P3.8 STM8S208MB.72 | length 1494.6
  Component Side w12: v1(2710,4420) P3.8@2710,4850 ; v1(2780,4135) 2980,4135 2980,4032.05 3166.02,3846.02 STM8S208MB.72
  Solder Side w12: v1(2710,4420) 2710,4205 v1(2780,4135)
PL2303_D+: R6.2 USB1.3 | length 533.8
  Component Side w12: USB1.3 2485,1860 2485,1640 2420,1575 2420,1500 R6.2
PL2303_D-: R4.2 USB1.2 | length 446.2
  Component Side w12: USB1.2 2519,1891 2519,1629 2482.91,1592.91 R4.2
PL2303_OSC1: C16.1 U3.27 XLAT2.2 | length 475.2
  Component Side w12: 2950,1504.92 2950,1610.26 2959.96,1620.22 U3.27
  Component Side w20: C16.1 3034.09,1405.91 XLAT2.2 ; 2950,1504.92 XLAT2.2@3040,1414.92
PL2303_OSC2: C15.1 U3.28 XLAT2.1 | length 644.6
  Component Side w12: 2985.55,1539.45 U3.28
  Component Side w15: 2985.55,1539.45 3025,1500
  Component Side w20: 3025,1500 3140,1500 XLAT2.1 3274.09,1365.91 C15.1
VCAP: C3.1 STM8S208MB.6 | length 332.1
  Component Side w10: 3560.43,3304.57 STM8S208MB.6
  Component Side w12: 3560.43,3304.57 C3.1
VCC_3.3: C4.2 C10.2 P11.1 P11.2 P11.3 P11.4 P11.5 P11.6 P11.7 P11.8 P11.9 P11.10 S1.1 U1.2 U3.4 | length 4878.5
  Component Side w12: U3.4 2915,1975.59 v1(2915,2100)
  Component Side w40: C10.2 3117.09,1942.91 3095,1965 3095,2055 3145,2105 3440,2105 3510,2035 3595,2035 ; U1.2 3595,2035 ; C4.2 3980,1910 3925,1910 3800,2035 3595,2035 ; P11.2@5280,2130 P11.1 P11.9 P11.10 ; P11.2 P11.4 P11.6 P11.8 P11.10 ; S1.1 5760,2698.03 5760,2345 5680,2265 P11.10
  Solder Side w12: v1(2915,2100) 3080,2100 v1(3105,2075)
  Solder Side w40: C4.2@4150,2040 P11.1
VCC_5: C1.2 C2.2 C14.1 P12.1 P12.2 P12.3 P12.4 P12.5 P12.6 P12.7 P12.8 P12.9 P12.10 R3.1 R5.1 S1.3 S2.2 U1.3 U3.19 U3.20 | length 6959.5
  Component Side w12: R5.1 2625.91,2100.91 2695,2170 ; U3.19 2765,1661.97 U3.20 ; R3.1 2780.75,2084.25 2780,2085 2695,2170 ; C14.1 3195,3394.84 3195,3265 2841,2911 2835.09,2911 2695,2770.91 2695,2170
  Component Side w20: 2765,1661.97 2765,1745
  Component Side w40: 2765,1745 v1(2985,1745) ; R3.1@2780,2085 v1(2780,2140) ; v1(3629.32,1725) 3717.16,1812.84 ; U1.3 3685.55,1844.45 3717.16,1812.84 ; C1.2 3995,1775 3755,1775 3717.16,1812.84 ; C1.2@4145.75,1655.75 C2.2 4302.91,1827.91 5015,2540 P12.1 ; 5280,2610 P12.1 ; P12.2 P12.4 P12.6 P12.8 P12.10 P12.9 P12.7 P12.5 P12.3 P12.1 ; P12.4@5363.78,2656.22 S1.3
  Solder Side w40: v1(2780,2140) 2775,2140 2985,1930 v1(2985,1745) 3185,1745 3205,1725 3320,1725 ; S2.2 3302.52,1707.52 3320,1725 ; v1(3629.32,1725) 3320,1725
VCC_USB: S2.3 USB1.1 | length 1015.8
  Component Side w40: 2390,1930 2531,1930 ; 2537,1930 2672,1795 3040,1795 3118.78,1716.22 3223.78,1716.22 S2.3
VDD: C5.1 C6.2 C7.2 C8.2 C9.2 R1.2 S1.2 STM8S208MB.7 STM8S208MB.8 STM8S208MB.23 STM8S208MB.49 SWIM.1 | length 6169.6
  Component Side w10: C9.2 3477.09,3132.09 C8.2 ; 3713.98,3778.98 STM8S208MB.49 ; R1.2 5015.75,3424.25
  Component Side w12: C9.2@3477.09,3132.09 v1(3525,3180) ; STM8S208MB.7 STM8S208MB.8 ; v1@3590,3350 3590,3355 3586.02,3358.98 3603.98,3358.98 3611.61,3366.61 STM8S208MB.8 ; 3713.98,3778.98 3611.61,3676.61 STM8S208MB.8 ; STM8S208MB.49 3713.98,4455.31 3882.25,4623.59 3882.25,4630.03 3891.62,4639.41 3898.07,4639.41 C6.2 ; v1(3902.48,3692.48) STM8S208MB.23 ; v1(4120,3450) 4215,3355 4215,3320 C5.1
  Component Side w20: v1(4280,3880) 4505,3880 4537.09,3847.91 C7.2 4935.75,3824.25 4997.09,3762.91 R1.2 ; 5015.75,3424.25 5322.52,3117.48 5442.52,3117.48 S1.2
  Solder Side w12: SWIM.1 3000,4070 3025,4045 3025,3875 3200,3700 v1(3630,3700) 3695,3635 3845,3635 v1(3902.48,3692.48) 3905,3650 ; v1(3525,3180) 3525,3285 v1@3590,3350 ; 3905,3645 v1@4110,3445
  Solder Side w20: 3919.42,3654.42 4145,3880 ; 4140,3890 v1@4275,3890
  other v1: 3605,3355
pads on no net: S1. S2. U1.4 U3.2 U3.3 U3.6 U3.8 U3.9 U3.10 U3.11 U3.12 U3.17 U3.24 USB1. USB1.NC XLAT1. XLAT2.

## Polygon pours and split planes (outlines as drawn)
GND on Component Side "Component Side-No Net" (hatched 90Degree grid 20 track 8): 2010,5055 5850,5055 5850,1255 5835,1240 5785,1290 1995,1290
GND on Solder Side "Component Side-No Net" (hatched 90Degree grid 20 track 8): 2010,5055 5850,5055 5860,5045 5860,1235 2030,1235 2000,1265

## Silkscreen, mask and mechanical layers (free items; w line width, h text height)
Top Overlay:
  text "PG0" at 4175,4945 h60
  text "PC0" at 5020,4945 h60
  text "PI7" at 2680,4940 h60
  text "PI0" at 3370,4935 h60
  text "PG7" at 3565,4935 h60
  text "PC7" at 4390,4930 h60
  text "PH7" at 5490,4785 h60
  text "PE7" at 2290,4780 h60
  text "PH0" at 5485,4195 h60
  text "PE0" at 2275,4070 h60
  text "VCC" at 3010,4045 h30
  text "PB0" at 5480,4045 h60
  text "SWIM" at 3010,3945 h30
  text "PD0" at 2270,3915 h60
  text "GND" at 3015,3850 h30
  text "NRST" at 3005,3745 h30
  text "PB7" at 5485,3335 h60
  text "PD7" at 2245,3195 h60
  text "3.3V" at 5560,3040 h30
  text "5V" at 5260,3035 h30
  text "PF0" at 4575,2390 h60
  text "PA0" at 2800,2385 h60
  text "PA7" at 3520,2385 h60
  text "PF7" at 3860,2385 h60
  text "ON" at 3055,1605 h30
  text "OFF" at 3535,1600 h30
  text "Project website:www.github.com/vincent5295/stm8teach" at 3500,1335 h40
Mechanical 1:
  the board outline again, w12